# EAGLE board Memory V1.0 (EAGLE 9.6.2)
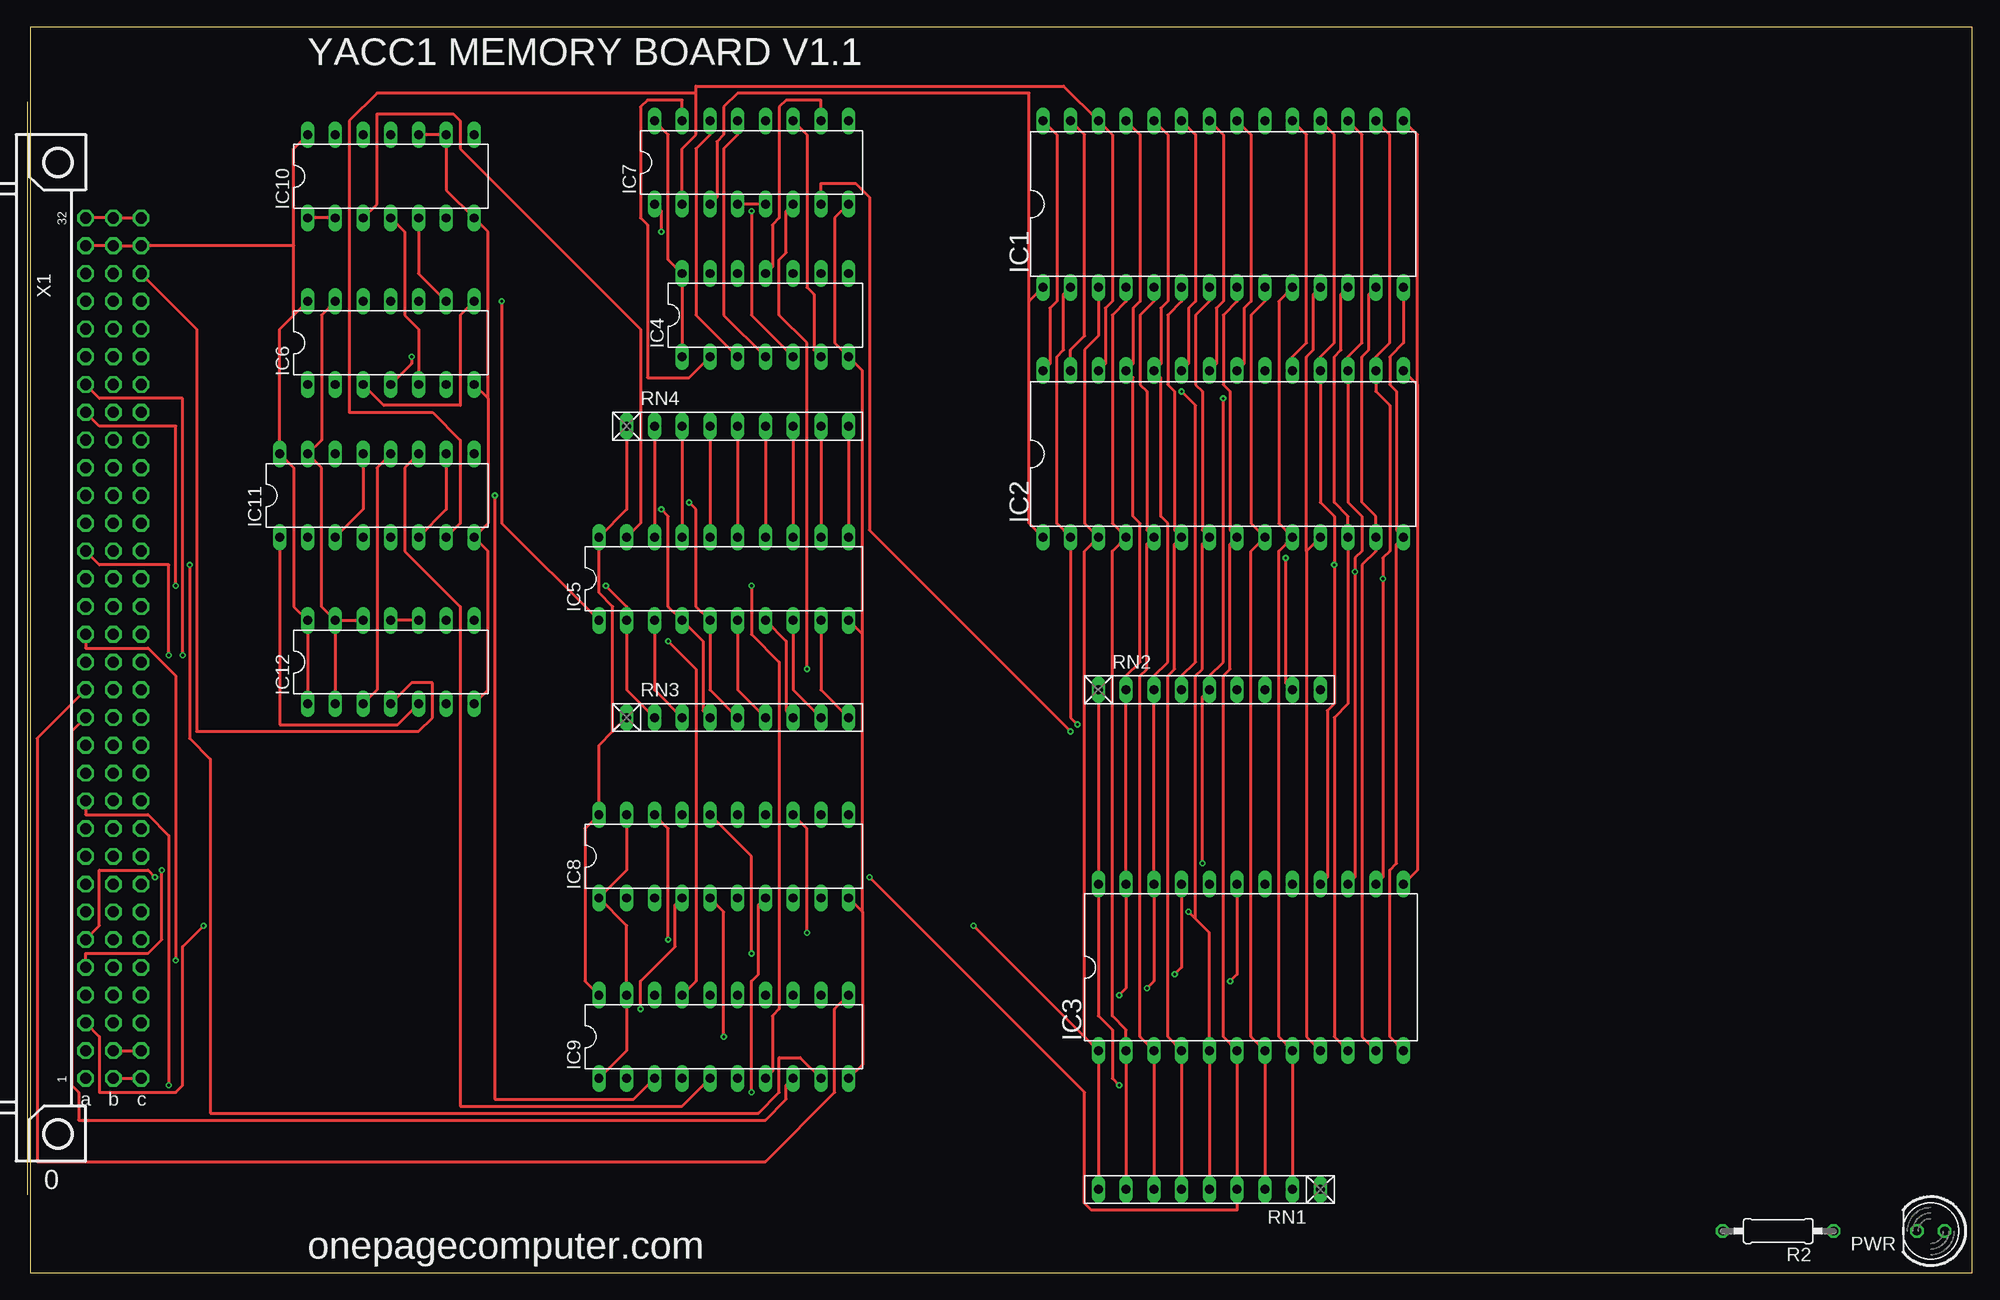
[diagram p0: board, top side]
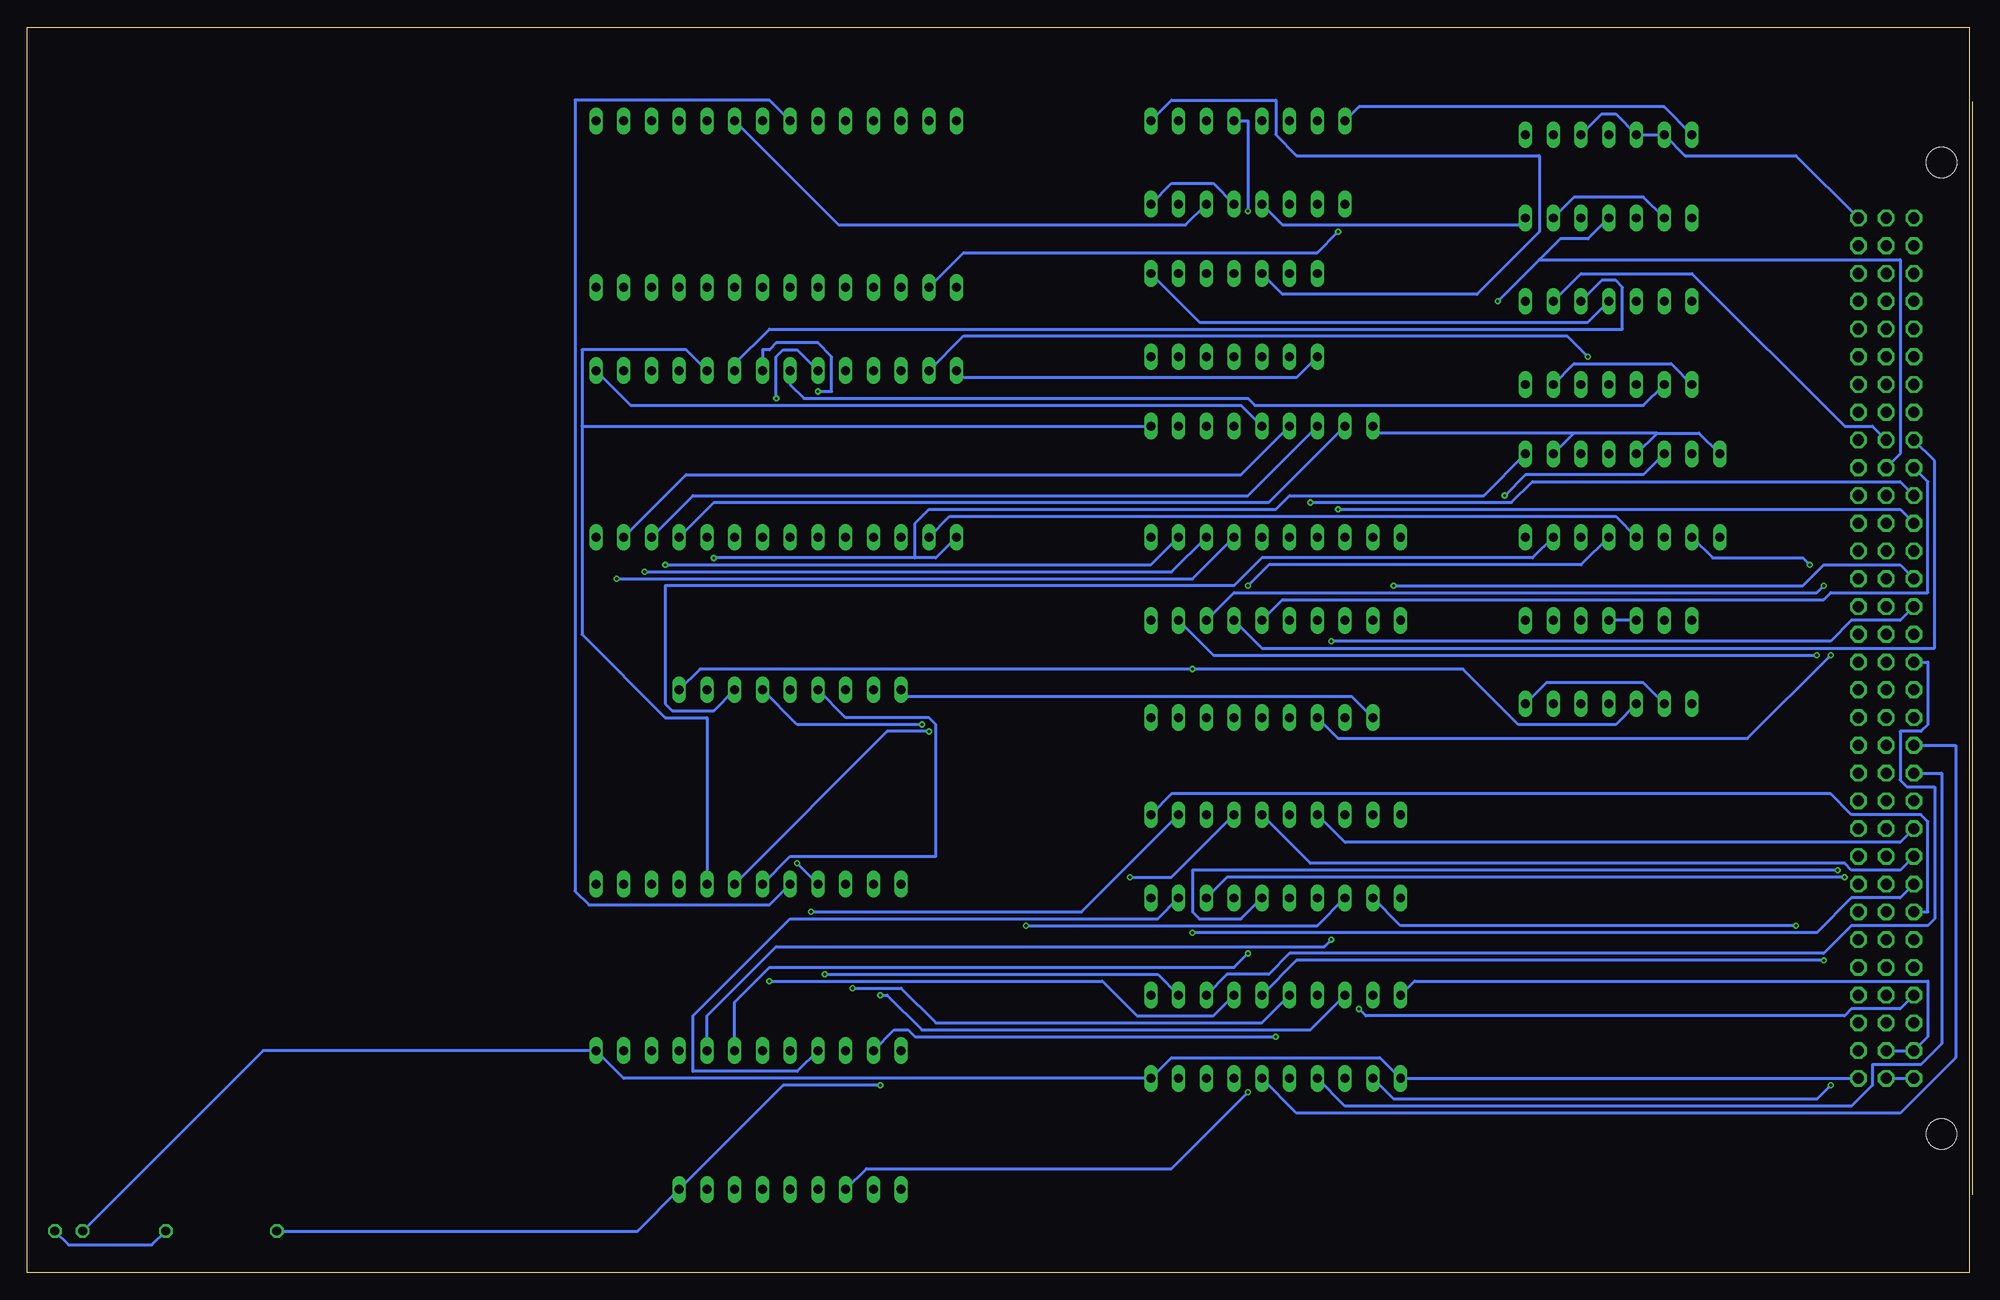
[diagram p1: board, bottom side, seen from below]

Size 177.78 x 113.97 mm. Coordinates in mm from the lower left corner, seen from the top.
Outline: 0,0 177.78,0 177.78,113.97 0,113.97 0,0
Copper layers (1*16): Top 0.035559375mm / dielectric 1.6mm / Bottom 0.035559375mm
Design rules "oshpark-2layer-auto-routing": minimum track width 10mil, minimum drill 10mil, track to track 10mil, track to pad 8mil, pad to pad 8mil, via to via 8mil, smd to smd 6mil, copper to edge 15mil, drill to drill 6mil, minimum pad ring 6mil, minimum via ring 6mil, stop-mask expansion 2.5mil, vias tented up to drill 0mil, thermal gap 10mil
Net classes: 1 GND: width 1 mm; 2 5V: width 1 mm

## Footprints (pad centres in the part's own frame; a part is rotated, then mirrored left to right if it is on the bottom)
DIL28-6 = drill 0.813 long: 1 -16.51,-7.62; 2 -13.97,-7.62; 3 -11.43,-7.62; 4 -8.89,-7.62; 5 -6.35,-7.62; 6 -3.81,-7.62; 7 -1.27,-7.62; 8 1.27,-7.62; 9 3.81,-7.62; 10 6.35,-7.62; 11 8.89,-7.62; 12 11.43,-7.62; 13 13.97,-7.62; 14 16.51,-7.62; 15 16.51,7.62; 16 13.97,7.62; 17 11.43,7.62; 18 8.89,7.62; 19 6.35,7.62; 20 3.81,7.62; 21 1.27,7.62; 22 -1.27,7.62; 23 -3.81,7.62; 24 -6.35,7.62; 25 -8.89,7.62; 26 -11.43,7.62; 27 -13.97,7.62; 28 -16.51,7.62
DIL24 = drill 0.813 long: 1 -13.97,-7.62; 2 -11.43,-7.62; 3 -8.89,-7.62; 4 -6.35,-7.62; 5 -3.81,-7.62; 6 -1.27,-7.62; 7 1.27,-7.62; 8 3.81,-7.62; 9 6.35,-7.62; 10 8.89,-7.62; 11 11.43,-7.62; 12 13.97,-7.62; 13 13.97,7.62; 14 11.43,7.62; 15 8.89,7.62; 16 6.35,7.62; 17 3.81,7.62; 18 1.27,7.62; 19 -1.27,7.62; 20 -3.81,7.62; 21 -6.35,7.62; 22 -8.89,7.62; 23 -11.43,7.62; 24 -13.97,7.62
DIL14 = drill 0.813 long: 1 -7.62,-3.81; 2 -5.08,-3.81; 3 -2.54,-3.81; 4 0,-3.81; 5 2.54,-3.81; 6 5.08,-3.81; 7 7.62,-3.81; 8 7.62,3.81; 9 5.08,3.81; 10 2.54,3.81; 11 0,3.81; 12 -2.54,3.81; 13 -5.08,3.81; 14 -7.62,3.81
DIL20 = drill 0.813 long: 1 -11.43,-3.81; 2 -8.89,-3.81; 3 -6.35,-3.81; 4 -3.81,-3.81; 5 -1.27,-3.81; 6 1.27,-3.81; 7 3.81,-3.81; 8 6.35,-3.81; 9 8.89,-3.81; 10 11.43,-3.81; 11 11.43,3.81; 12 8.89,3.81; 13 6.35,3.81; 14 3.81,3.81; 15 1.27,3.81; 16 -1.27,3.81; 17 -3.81,3.81; 18 -6.35,3.81; 19 -8.89,3.81; 20 -11.43,3.81
DIL16 = drill 0.813 long: 1 -8.89,-3.81; 2 -6.35,-3.81; 3 -3.81,-3.81; 4 -1.27,-3.81; 5 1.27,-3.81; 6 3.81,-3.81; 7 6.35,-3.81; 8 8.89,-3.81; 9 8.89,3.81; 10 6.35,3.81; 11 3.81,3.81; 12 1.27,3.81; 13 -1.27,3.81; 14 -3.81,3.81; 15 -6.35,3.81; 16 -8.89,3.81
LED5MM = drill 0.813 octagon: A -1.27,0; K 1.27,0
0207/10 = drill 0.813 octagon: 1 -5.08,0; 2 5.08,0
RN-9 = drill 0.813 long: 1 -10.16,0; 2 -7.62,0; 3 -5.08,0; 4 -2.54,0; 5 0,0; 6 2.54,0; 7 5.08,0; 8 7.62,0; 9 10.16,0
FABC96R = drill 1.016 octagon: A1 -2.54,39.37; A2 -2.54,36.83; A3 -2.54,34.29; A4 -2.54,31.75; A5 -2.54,29.21; A6 -2.54,26.67; A7 -2.54,24.13; A8 -2.54,21.59; A9 -2.54,19.05; A10 -2.54,16.51; A11 -2.54,13.97; A12 -2.54,11.43; A13 -2.54,8.89; A14 -2.54,6.35; A15 -2.54,3.81; A16 -2.54,1.27; A17 -2.54,-1.27; A18 -2.54,-3.81; A19 -2.54,-6.35; A20 -2.54,-8.89; A21 -2.54,-11.43; A22 -2.54,-13.97; A23 -2.54,-16.51; A24 -2.54,-19.05; A25 -2.54,-21.59; A26 -2.54,-24.13; A27 -2.54,-26.67; A28 -2.54,-29.21; A29 -2.54,-31.75; A30 -2.54,-34.29; A31 -2.54,-36.83; A32 -2.54,-39.37; B1 -5.08,39.37; B2 -5.08,36.83; B3 -5.08,34.29; B4 -5.08,31.75; B5 -5.08,29.21; B6 -5.08,26.67; B7 -5.08,24.13; B8 -5.08,21.59; B9 -5.08,19.05; B10 -5.08,16.51; B11 -5.08,13.97; B12 -5.08,11.43; B13 -5.08,8.89; B14 -5.08,6.35; B15 -5.08,3.81; B16 -5.08,1.27; B17 -5.08,-1.27; B18 -5.08,-3.81; B19 -5.08,-6.35; B20 -5.08,-8.89; B21 -5.08,-11.43; B22 -5.08,-13.97; B23 -5.08,-16.51; B24 -5.08,-19.05; B25 -5.08,-21.59; B26 -5.08,-24.13; B27 -5.08,-26.67; B28 -5.08,-29.21; B29 -5.08,-31.75; B30 -5.08,-34.29; B31 -5.08,-36.83; B32 -5.08,-39.37; C1 -7.62,39.37; C2 -7.62,36.83; C3 -7.62,34.29; C4 -7.62,31.75; C5 -7.62,29.21; C6 -7.62,26.67; C7 -7.62,24.13; C8 -7.62,21.59; C9 -7.62,19.05; C10 -7.62,16.51; C11 -7.62,13.97; C12 -7.62,11.43; C13 -7.62,8.89; C14 -7.62,6.35; C15 -7.62,3.81; C16 -7.62,1.27; C17 -7.62,-1.27; C18 -7.62,-3.81; C19 -7.62,-6.35; C20 -7.62,-8.89; C21 -7.62,-11.43; C22 -7.62,-13.97; C23 -7.62,-16.51; C24 -7.62,-19.05; C25 -7.62,-21.59; C26 -7.62,-24.13; C27 -7.62,-26.67; C28 -7.62,-29.21; C29 -7.62,-31.75; C30 -7.62,-34.29; C31 -7.62,-36.83; C32 -7.62,-39.37 | hole 2.794: 0,-44.456; 0,44.456

## Placement (x,y rotation side)
IC1  [DIL28-6]  109.22,97.79 0 top
IC2  [DIL28-6]  109.22,74.93 0 top
IC3  [DIL24]  111.76,27.94 0 top
IC4  74ALS30N  [DIL14]  67.31,87.63 0 top
IC5  74LS245N  [DIL20]  63.5,63.5 0 top
IC6  74LS04N  [DIL14]  33.02,85.09 0 top
IC7  74LS138N  [DIL16]  66.04,101.6 0 top
IC8  74LS244N  [DIL20]  63.5,38.1 0 top
IC9  74LS244N  [DIL20]  63.5,21.59 0 top
IC10  74ALS00N  [DIL14]  33.02,100.33 0 top
IC11  74LS157N  [DIL16]  31.75,71.12 0 top
IC12  74LS74N  [DIL14]  33.02,55.88 0 top
PWR  [LED5MM]  173.99,3.81 180 top
R2  330  [0207/10]  160.02,3.81 180 top
RN1  [RN-9]  107.95,7.62 180 top
RN2  [RN-9]  107.95,53.34 0 top
RN3  [RN-9]  64.77,50.8 0 top
RN4  [RN-9]  64.77,77.47 0 top
X1  FABC96R  [FABC96R]  2.54,57.15 180 top

## Library data of the parts
IC1 IC2 = memory-hitachi; OC_FARNELL: unknown; OC_NEWARK: unknown
IC3 = memory
IC4 IC6-IC12 = 74xx-us
IC5 = adafruit
PWR = led
R2 = eagle-ltspice; SPICEMODEL: NONE; SPICEPREFIX: R
RN1-RN4 = resistor-net; OC_FARNELL: unknown; OC_NEWARK: unknown
X1 = con-vg

## Nets
-AC-LD: X1.C22
-AC-LD-INV: X1.C20
-AC-RD: X1.C21
-ADDR-REG-LD0: X1.C4
-ADDR-REG-LD1: X1.C6
-ADDR-REG-RD0: X1.C3
-ADDR-REG-RD1: X1.C5
-ALU-FUNC: X1.C15
-BUS-EN: X1.C28
-HI-RAM: IC2.20 IC6.10
-HL-SWAP: X1.C25
-IN: X1.C26
-INT: X1.C13
-INTA: X1.C14
-IO-ADDR-LD: X1.C11
-IO-RD: X1.B25
-IO-WR: X1.B26
-MEM-RD: IC5.1 IC6.5 IC10.4 X1.B23
-MEM-WR: IC6.9 IC10.5 X1.B24
-OUT: X1.C27
-REG-DN: X1.B21
-REG-FUNC-LD: X1.B8
-REG-FUNC-RD: X1.B7
-REG-LD-HI: X1.B20
-REG-LD-LO: X1.B18
-REG-RD-HI: X1.B19
-REG-RD-LO: X1.B17
-REG-UP: X1.B22
-RESET: IC12.4 X1.C30
-ROM: IC3.18 IC7.7
-RUN: X1.C29
-SR-LD: X1.C23
-TMP-REG-LD0: X1.B28
-TMP-REG-LD1: X1.B30
-TMP-REG-RD0: X1.B27
-TMP-REG-RD1: X1.B29
ADDR0: IC8.2 X1.A3
ADDR1: IC8.4 X1.A4
ADDR2: IC8.6 X1.A5
ADDR3: IC8.8 X1.A6
ADDR4: IC8.11 X1.A7
ADDR5: IC8.13 X1.A8
ADDR6: IC8.15 X1.A9
ADDR7: IC8.17 X1.A10
ADDR8: IC9.2 X1.A11
ADDR9: IC9.4 X1.A12
ADDR10: IC9.6 X1.A13
ADDR11: IC9.8 X1.A14
ADDR12: IC9.11 X1.A15
ADDR13: IC9.13 X1.A16
ADDR14: IC9.15 X1.A17
ADDR15: IC9.17 X1.A18
ALU0: X1.C16
ALU1: X1.C17
ALU2: X1.C18
ALU3: X1.C19
BADDR0: IC1.10 IC2.10 IC3.8 IC8.18 RN1.2
BADDR1: IC1.9 IC2.9 IC3.7 IC8.16 RN1.3
BADDR2: IC1.8 IC2.8 IC3.6 IC8.14 RN1.4
BADDR3: IC1.7 IC2.7 IC3.5 IC8.12 RN1.5
BADDR4: IC1.6 IC2.6 IC3.4 IC8.9 RN1.6
BADDR5: IC1.5 IC2.5 IC3.3 IC8.7 RN1.7
BADDR6: IC1.4 IC2.4 IC3.2 IC8.5 RN1.8
BADDR7: IC1.3 IC2.3 IC3.1 IC8.3 RN1.9
BADDR8: IC1.25 IC2.25 IC3.23 IC9.18 RN2.2
BADDR9: IC1.24 IC2.24 IC3.22 IC9.16 RN2.3
BADDR10: IC1.21 IC2.21 IC3.19 IC9.14 RN2.4
BADDR11: IC1.23 IC2.23 IC3.21 IC9.12 RN2.5
BADDR12: IC1.2 IC2.2 IC7.1 IC11.4 RN2.6
BADDR13: IC1.26 IC2.26 IC7.2 IC11.7 RN2.7
BADDR14: IC1.1 IC2.1 IC7.3 IC11.9 RN2.8
BADDR15: IC1.20 IC7.6 IC11.12 IC12.3 RN2.9
BDATA0: IC1.11 IC2.11 IC3.9 IC5.18 RN4.2
BDATA1: IC1.12 IC2.12 IC3.10 IC5.17 RN4.3
BDATA2: IC1.13 IC2.13 IC3.11 IC5.16 RN4.4
BDATA3: IC1.15 IC2.15 IC3.13 IC5.15 RN4.5
BDATA4: IC1.16 IC2.16 IC3.14 IC5.14 RN4.6
BDATA5: IC1.17 IC2.17 IC3.15 IC5.13 RN4.7
BDATA6: IC1.18 IC2.18 IC3.16 IC5.12 RN4.8
BDATA7: IC1.19 IC2.19 IC3.17 IC5.11 RN4.9
BR-COND: X1.C24
DATA0: IC5.2 RN3.2 X1.A19
DATA1: IC5.3 RN3.3 X1.A20
DATA2: IC5.4 RN3.4 X1.A21
DATA3: IC5.5 RN3.5 X1.A22
DATA4: IC5.6 RN3.6 X1.A23
DATA5: IC5.7 RN3.7 X1.A24
DATA6: IC5.8 RN3.8 X1.A25
DATA7: IC5.9 RN3.9 X1.A26
DATA8: X1.A27
DATA9: X1.A28
DATA10: X1.A29
DATA11: X1.A30
DATA12: X1.B3
DATA13: X1.B4
DATA14: X1.B5
DATA15: X1.B6
FORCE-ROM: IC11.1 IC12.5
GND: IC1.14 IC2.14 IC3.12 IC4.7 IC5.10 IC6.7 IC6.13 IC7.4 IC7.5 IC7.8 IC8.1 IC8.10 IC8.19 IC9.1 IC9.10 IC9.19 IC10.7 IC10.9 IC10.10 IC10.12 IC10.13 IC11.8 IC11.15 IC12.2 IC12.7 IC12.10 IC12.11 IC12.12 IC12.13 PWR.K X1.A1 X1.A32 X1.B1 X1.B32 X1.C1 X1.C32
IO-ADDR0: X1.C7
IO-ADDR1: X1.C8
IO-ADDR2: X1.C9
IO-ADDR3: X1.C10
MEM-RD: IC6.1 IC6.6
N$1: IC4.12 IC7.9
N$2: IC6.3 IC6.8
N$3: IC1.22 IC2.22 IC3.20 IC6.2
N$4: IC1.27 IC2.27 IC6.4
N$5: IC4.11 IC7.10
N$6: IC4.6 IC7.11
N$7: IC4.5 IC7.12
N$8: IC4.4 IC7.13
N$9: IC4.3 IC7.14
N$10: IC4.2 IC7.15
N$11: PWR.A R2.1
N$12: IC10.1 IC10.2 IC10.6
N$13: IC5.19 IC10.3
N$14: IC4.8 IC6.11
N$15: IC9.9 IC11.2
N$16: IC9.7 IC11.5
N$17: IC9.5 IC11.11
N$18: IC9.3 IC11.14
REG-LD-ID0: X1.B13
REG-LD-ID1: X1.B14
REG-LD-ID2: X1.B15
REG-LD-ID3: X1.B16
REG-RD-ID0: X1.B9
REG-RD-ID1: X1.B10
REG-RD-ID2: X1.B11
REG-RD-ID3: X1.B12
UNUSED0: X1.C12
VCC: IC1.28 IC2.28 IC3.24 IC4.1 IC4.14 IC5.20 IC6.14 IC7.16 IC8.20 IC9.20 IC10.14 IC11.3 IC11.6 IC11.10 IC11.13 IC11.16 IC12.1 IC12.14 R2.2 RN1.1 RN2.1 RN3.1 RN4.1 X1.A2 X1.A31 X1.B2 X1.B31 X1.C2 X1.C31

## Tracks (layer width: path | path; a pad name or v marks a point on that pad's centre or on a via)
-HI-RAM
  Bottom 0.254: IC6.10 33.66,90.81 32.38,90.81 31.75,90.17 31.75,86.36 109.86,86.36 113.03,83.19 IC2.20
-MEM-RD  (via drill 0.25)
  Top 0.254: IC5.1 43.18,68.58 v43.18,88.9 | IC6.5 35.56,86.36 34.29,87.63 34.29,95.25 IC10.4
  Bottom 0.254: 39.37,92.71 37.47,94.61 34.92,94.61 IC10.4 | 39.37,92.71 v43.18,88.9 | X1.B23 6.35,74.93 6.35,92.71 39.37,92.71
-MEM-WR
  Top 0.254: IC6.9 35.56,91.44 IC10.5
  Bottom 0.254: X1.B24 8.89,77.47 11.43,77.47 25.4,91.44 35.56,91.44 IC6.9
-RESET
  Top 0.254: IC12.4 34.92,53.98 36.83,53.98 36.83,50.8 35.56,49.53 15.24,49.53 15.24,86.36 X1.C30
-ROM  (via drill 0.25)
  Top 0.254: v95.25,49.53 76.83,67.94 76.83,98.42 75.56,99.69 72.39,99.69 IC7.7
  Bottom 0.254: IC3.18 99.06,49.53 v95.25,49.53
ADDR0  (via drill 0.25)
  Top 0.254: v15.88,31.75 13.97,29.84 13.97,17.14 13.34,16.51 6.35,16.51 6.35,21.59 X1.A3
  Bottom 0.254: IC8.2 52.07,31.75 v15.88,31.75
ADDR1  (via drill 0.25)
  Top 0.254: IC8.4 59.05,33.66 59.05,29.84 55.88,26.67 v55.88,24.13
  Bottom 0.254: v55.88,24.13 55.24,23.5 11.43,23.5 10.79,24.13 6.35,24.13 X1.A4
ADDR2  (via drill 0.25)
  Top 0.254: v12.06,36.83 12.06,30.48 10.79,29.21 5.08,29.21 X1.A5
  Bottom 0.254: IC8.6 66.67,32.38 70.48,32.38 71.12,33.02 71.12,36.83 v12.06,36.83
ADDR3  (via drill 0.25)
  Top 0.254: v11.43,36.2 10.79,36.83 6.35,36.83 6.35,31.75 X1.A6
  Bottom 0.254: IC8.8 67.94,36.2 v11.43,36.2
ADDR4
  Bottom 0.254: IC8.11 73.03,43.81 12.7,43.81 10.79,41.91 4.45,41.91 3.81,41.27 3.81,33.02 X1.A7
ADDR5  (via drill 0.25)
  Top 0.254: IC8.13 71.12,40.64 v71.12,31.11
  Bottom 0.254: v71.12,31.11 13.97,31.11 10.79,34.29 6.35,34.29 X1.A8
ADDR6
  Bottom 0.254: IC8.15 60.33,37.47 11.43,37.47 10.79,36.83 6.35,36.83 X1.A9
ADDR7
  Bottom 0.254: IC8.17 57.15,39.37 6.35,39.37 X1.A10
ADDR8  (via drill 0.25)
  Top 0.254: v12.7,17.14 12.7,40.01 10.79,41.91 5.08,41.91 X1.A11
  Bottom 0.254: IC9.2 52.7,15.88 13.97,15.88 v12.7,17.14
ADDR9
  Bottom 0.254: IC9.4 57.15,15.24 10.79,15.24 8.89,17.14 8.89,19.05 4.45,19.05 2.54,20.95 2.54,45.72 X1.A12
ADDR10
  Bottom 0.254: IC9.6 61.59,14.61 6.35,14.61 1.27,19.68 1.27,48.26 X1.A13
ADDR11
  Top 0.254: IC9.8 69.22,17.14 69.22,15.88 67.31,13.97 4.45,13.97 4.45,16.51 3.81,17.14 3.81,49.53 X1.A14
ADDR12
  Top 0.254: IC9.11 73.66,24.13 73.66,16.51 67.31,10.16 0.64,10.16 0.64,48.9 X1.A15
ADDR13
  Bottom 0.254: IC9.13 67.94,27.3 64.14,27.3 62.23,29.21 13.34,29.21 10.79,31.75 3.81,31.75 3.17,32.38 3.17,44.45 5.71,44.45 6.35,45.09 6.35,49.53 4.45,49.53 3.81,50.16 3.81,55.88 X1.A16
ADDR14  (via drill 0.25)
  Top 0.254: v13.34,28.57 13.34,54.61 10.79,57.15 5.08,57.15 X1.A17
  Bottom 0.254: IC9.15 61.59,28.57 v13.34,28.57
ADDR15  (via drill 0.25)
  Top 0.254: IC9.17 60.96,26.67 60.96,55.24 v58.42,57.78
  Bottom 0.254: v58.42,57.78 12.7,57.78 10.79,59.69 6.35,59.69 X1.A18
BADDR0  (via drill 0.25)
  Top 0.254: IC1.10 114.3,88.9 114.3,68.58 IC2.10 114.3,66.04 114.3,21.59 IC3.8 RN1.2 | IC8.18 58.42,40.64 v58.42,30.48
  Bottom 0.254: v58.42,30.48 59.05,29.84 109.22,29.84 115.57,23.5 IC3.8
BADDR1  (via drill 0.25)
  Top 0.254: IC1.9 113.03,88.9 111.76,87.63 111.76,68.58 IC2.9 111.76,66.04 111.76,21.59 IC3.7 RN1.3 | IC8.16 66.04,38.1 v66.04,29.21
  Bottom 0.254: v66.04,29.21 67.31,27.94 109.86,27.94 113.03,24.77 IC3.7
BADDR2  (via drill 0.25)
  Top 0.254: IC1.8 110.49,88.9 109.22,87.63 109.22,81.28 109.86,80.64 109.86,67.94 IC2.8 109.86,66.67 109.86,55.24 109.22,54.61 109.22,21.59 IC3.6 RN1.4 110.49,5.71 97.16,5.71 96.52,6.35 96.52,16.51 v76.83,36.2
  Bottom 0.254: IC8.14 73.03,36.2 v76.83,36.2
BADDR3  (via drill 0.25)
  Top 0.254: IC1.7 107.95,88.9 106.68,87.63 106.68,81.28 107.31,80.64 107.31,67.94 IC2.7 107.31,66.67 107.31,55.24 106.68,54.61 106.68,32.38 | RN1.5 IC3.5 107.95,31.11 106.68,32.38 | 106.68,32.38 v106.05,33.02
  Bottom 0.254: IC8.12 81.28,33.02 v106.05,33.02
BADDR4
  Top 0.254: IC1.6 105.41,88.9 104.14,87.63 104.14,81.28 104.78,80.64 104.78,67.94 IC2.6 104.78,66.67 104.78,55.24 104.14,54.61 104.14,21.59 IC3.4 RN1.6
  Bottom 0.254: IC8.9 74.3,32.38 107.95,32.38 116.84,23.5 116.84,18.41 107.31,18.41 IC3.4
BADDR5  (via drill 0.25)
  Top 0.254: IC1.5 102.87,88.9 101.6,87.63 101.6,81.28 102.23,80.64 102.23,67.94 IC2.5 102.23,66.67 102.23,55.24 101.6,54.61 101.6,21.59 IC3.3 RN1.7 | IC8.7 66.67,33.66 66.67,27.3 66.04,26.67 v66.04,16.51
  Bottom 0.254: v66.04,16.51 73.03,9.53 100.97,9.53 RN1.7
BADDR6  (via drill 0.25)
  Top 0.254: IC1.4 100.33,88.9 99.06,87.63 99.06,68.58 IC2.4 99.06,66.04 99.06,23.5 100.33,22.23 IC3.2 RN1.8 | IC8.5 63.5,33.02 v63.5,21.59
  Bottom 0.254: v63.5,21.59 96.52,21.59 97.16,22.23 98.42,22.23 IC3.2
BADDR7  (via drill 0.25)
  Top 0.254: IC1.3 97.79,85.72 96.52,84.45 96.52,68.58 IC2.3 96.52,66.04 96.52,21.59 | RN1.9 IC3.1 96.52,21.59 | 96.52,21.59 v86.36,31.75
  Bottom 0.254: IC8.3 59.69,31.75 v86.36,31.75
BADDR8  (via drill 0.25)
  Top 0.254: IC1.25 101.6,104.14 101.6,88.9 100.97,88.27 100.97,83.19 IC2.25 100.97,81.92 100.97,69.22 101.6,68.58 101.6,55.88 100.33,54.61 RN2.2 IC3.23 100.33,26.04 v99.69,25.4
  Bottom 0.254: IC9.18 60.33,22.23 95.89,22.23 99.06,25.4 v99.69,25.4
BADDR9  (via drill 0.25)
  Top 0.254: IC1.24 104.14,104.14 104.14,88.9 103.5,88.27 103.5,83.19 IC2.24 103.5,81.92 103.5,69.22 104.14,68.58 104.14,55.88 102.87,54.61 RN2.3 IC3.22 102.87,26.67 v102.23,26.04
  Bottom 0.254: IC9.16 64.77,22.86 94.61,22.86 97.79,26.04 v102.23,26.04
BADDR10  (via drill 0.25)
  Top 0.254: IC2.21 111.12,83.19 111.12,88.27 111.76,88.9 111.76,104.14 IC1.21 | v109.86,26.67 110.49,27.3 IC3.19 | v105.41,80.64 106.68,79.38 106.68,55.88 105.41,54.61 RN2.4
  Bottom 0.254: IC9.14 69.22,23.5 76.2,23.5 79.38,26.67 v109.86,26.67 | RN2.4 102.87,50.8 95.25,50.8 94.61,50.16 94.61,38.1 107.95,38.1 IC3.19 | IC2.21 110.49,84.45 109.86,84.45 109.22,85.09 105.41,85.09 104.14,83.82 104.14,80.64 v105.41,80.64
BADDR11  (via drill 0.25)
  Top 0.254: IC2.23 106.05,83.19 106.05,88.27 106.68,88.9 106.68,104.14 IC1.23 | v104.78,27.3 105.41,27.94 IC3.21 | v107.31,37.47 107.31,52.7 RN2.5 107.95,54.61 109.22,55.88 v109.22,80.01
  Bottom 0.254: IC9.12 74.3,27.3 v104.78,27.3 | IC3.21 v107.31,37.47 | IC2.23 107.31,84.45 108.58,84.45 109.22,83.82 v109.22,80.01
BADDR12  (via drill 0.25)
  Top 0.254: v95.89,50.16 95.25,50.8 IC2.2 93.98,68.58 93.98,83.82 94.61,84.45 94.61,89.53 IC1.2 | IC7.1 57.78,97.16 v57.78,95.25
  Bottom 0.254: IC11.4 32.38,69.22 93.34,69.22 IC2.2 | RN2.6 107.31,50.16 v95.89,50.16 | v57.78,95.25 59.69,93.34 92.08,93.34 IC1.2
BADDR13
  Top 0.254: IC2.26 98.42,83.19 98.42,88.27 99.06,88.9 99.06,104.14 IC1.26 94.61,108.58 60.96,108.58 60.96,107.95 | IC11.7 39.37,68.58 39.37,76.2 36.83,78.74 29.21,78.74 29.21,105.41 31.75,107.95 60.96,107.95 | 60.96,107.95 60.96,104.14 59.69,102.87 IC7.2
  Bottom 0.254: RN2.7 114.94,51.44 118.75,51.44 119.38,52.07 119.38,62.87 67.31,62.87 64.77,65.41 40.01,65.41 IC11.7
BADDR14  (via drill 0.25)
  Top 0.254: 91.44,88.9 IC1.1 | 91.44,88.9 91.44,68.58 IC2.1 | RN2.8 114.94,53.98 v114.94,65.41 | IC7.3 62.87,98.42 62.87,103.5 63.5,104.14 63.5,106.68 64.77,107.95 91.44,107.95 91.44,88.9
  Bottom 0.254: IC11.9 44.45,71.12 62.23,71.12 63.5,69.85 95.25,69.85 96.52,68.58 96.52,65.41 | 96.52,65.41 94.61,65.41 IC2.1 | 96.52,65.41 v114.94,65.41
BADDR15  (via drill 0.25)
  Top 0.254: IC12.3 31.75,53.34 31.75,73.66 IC11.12 | IC7.6 69.22,97.16 69.22,93.34 68.58,92.71 68.58,87.63 71.12,85.09 v71.12,55.24
  Bottom 0.254: IC7.6 71.75,95.89 103.5,95.89 IC1.20 | RN2.9 116.2,55.24 v71.12,55.24 46.35,55.24 41.27,50.16 32.38,50.16 IC12.3
BDATA0
  Top 0.254: RN4.2 IC5.18 | IC3.9 116.84,21.59 116.84,66.04 | IC2.11 116.84,66.04 | IC1.11 117.47,89.53 117.47,84.45 116.84,83.82 116.84,66.04
  Bottom 0.254: RN4.2 64.14,70.48 114.94,70.48 IC2.11
BDATA1
  Top 0.254: RN4.3 IC5.17 | IC3.10 119.38,21.59 119.38,50.8 120.65,52.07 IC2.12 120.65,69.22 119.38,70.48 119.38,83.82 120.02,84.45 120.02,89.53 IC1.12
  Bottom 0.254: RN4.3 66.04,71.12 116.84,71.12 IC2.12
BDATA2
  Top 0.254: RN4.4 IC5.16 | IC3.11 121.92,21.59 121.92,64.77 123.19,66.04 IC2.13 123.19,69.22 121.92,70.48 121.92,83.82 122.56,84.45 122.56,89.53 IC1.13
  Bottom 0.254: RN4.4 66.67,73.03 117.47,73.03 IC2.13
BDATA3
  Top 0.254: RN4.5 IC5.15 | IC3.13 127,36.83 127,81.28 | IC2.15 127,81.28 | IC1.15 127,104.14 127,81.28
  Bottom 0.254: RN4.5 66.67,79.38 122.56,79.38 IC2.15
BDATA4  (via drill 0.25)
  Top 0.254: RN4.6 IC5.14 | IC3.14 123.83,36.2 v123.83,63.5 123.83,65.41 124.46,66.04 124.46,79.38 123.19,80.64 IC2.16 123.19,83.82 124.46,85.09 124.46,104.14 IC1.16
  Bottom 0.254: IC5.14 71.12,63.5 v123.83,63.5
BDATA5  (via drill 0.25)
  Top 0.254: RN4.7 IC5.13 | IC3.15 121.28,36.2 v121.28,64.14 121.28,65.41 121.92,66.04 121.92,69.22 120.65,70.48 IC2.17 120.65,83.82 121.92,85.09 121.92,104.14 IC1.17
  Bottom 0.254: IC5.13 73.03,64.14 v121.28,64.14
BDATA6  (via drill 0.25)
  Top 0.254: RN4.8 IC5.12 | IC3.16 118.75,36.2 118.75,51.44 119.38,52.07 v119.38,64.77 119.38,69.22 118.11,70.48 IC2.18 118.11,83.82 119.38,85.09 119.38,104.14 IC1.18
  Bottom 0.254: IC5.12 74.93,64.77 v119.38,64.77
BDATA7
  Top 0.254: RN4.9 IC5.11 | IC1.19 116.84,104.14 116.84,85.09 115.57,83.82 IC2.19
  Bottom 0.254: IC3.17 115.57,50.8 119.38,50.8 127,58.42 127,77.47 | 127,77.47 127,84.45 117.47,84.45 IC2.19 | 127,77.47 RN4.9
DATA0  (via drill 0.25)
  Top 0.254: RN3.2 54.61,53.34 IC5.2 54.61,60.96 v52.7,62.87
  Bottom 0.254: X1.A19 6.35,64.77 13.34,64.77 15.24,62.87 v52.7,62.87
DATA1  (via drill 0.25)
  Top 0.254: RN3.3 57.15,53.34 IC5.3 | X1.A20 6.35,64.77 12.7,64.77 v12.7,56.52
  Bottom 0.254: v12.7,56.52 20.32,48.9 57.78,48.9 RN3.3
DATA2  (via drill 0.25)
  Top 0.254: RN3.4 61.59,51.44 61.59,57.78 IC5.4 58.42,60.96 58.42,69.22 v57.78,69.85
  Bottom 0.254: X1.A21 6.35,69.85 v57.78,69.85
DATA3  (via drill 0.25)
  Top 0.254: RN3.5 62.23,53.34 IC5.5 60.96,60.96 60.96,69.85 v60.33,70.48
  Bottom 0.254: X1.A22 6.35,72.39 40.01,72.39 41.91,70.48 v60.33,70.48
DATA4
  Top 0.254: RN3.6 64.77,53.34 IC5.6
  Bottom 0.254: X1.A23 3.81,72.39 3.81,62.23 12.7,62.23 13.34,61.59 62.87,61.59 IC5.6
DATA5
  Top 0.254: RN3.7 69.22,51.44 69.22,57.78 IC5.7
  Bottom 0.254: X1.A24 3.17,74.3 3.17,57.15 64.77,57.15 IC5.7
DATA6  (via drill 0.25)
  Top 0.254: RN3.8 69.85,53.34 IC5.8 | X1.A25 6.35,77.47 13.34,77.47 v13.34,62.87
  Bottom 0.254: v13.34,62.87 13.97,62.23 67.31,62.23 IC5.8
DATA7  (via drill 0.25)
  Top 0.254: RN3.9 72.39,53.34 IC5.9 | X1.A26 6.35,80.01 13.97,80.01 v13.97,56.52
  Bottom 0.254: v13.97,56.52 69.22,56.52 IC5.9
FORCE-ROM
  Top 0.254: IC12.5 33.66,50.16 22.86,50.16 IC11.1
GND
  Top 0.254: X1.A32 X1.B32 X1.C32 | IC10.10 IC10.9 38.1,99.06 IC10.7 41.91,95.25 41.91,80.01 | IC6.13 26.67,87.63 26.67,76.2 IC11.15 26.67,73.66 26.67,60.96 IC12.13 | 41.91,80.01 41.91,68.58 IC11.8 41.91,66.04 41.91,53.34 IC12.7 | IC6.7 41.91,80.01 | IC12.10 IC12.11 | IC12.13 IC12.2 | IC12.13 IC12.12 | IC8.19 54.61,36.83 IC8.1 54.61,31.75 IC9.19 54.61,20.32 IC9.1 | X1.B1 X1.C1 | IC7.5 IC7.4 | IC7.8 73.66,96.52 73.66,85.09 IC4.7 76.2,82.55 76.2,58.42 | IC1.14 125.73,85.09 124.46,83.82 124.46,81.28 125.09,80.64 125.09,67.94 IC2.14 125.09,66.67 125.09,37.47 124.46,36.83 124.46,21.59 IC3.12 | IC9.10 76.2,19.05 76.2,33.02 | IC8.10 76.2,33.02 | 76.2,58.42 IC5.10 | 76.2,33.02 76.2,58.42
  Bottom 0.254: IC10.10 33.66,106.05 32.38,106.05 IC10.12 IC10.13 26.04,102.23 15.88,102.23 X1.C32 | IC12.7 38.73,53.98 29.84,53.98 IC12.2 | IC12.12 IC12.11 | X1.B1 X1.A1 | X1.C1 IC9.1 53.98,19.68 73.03,19.68 IC9.10 123.19,17.78 IC3.12 156.21,20.32 PWR.K | IC7.5 69.22,99.69 73.03,99.69 IC7.8 | IC10.7 41.27,95.89 62.87,95.89 IC7.4
MEM-RD
  Bottom 0.254: IC6.1 27.3,83.19 36.2,83.19 IC6.6
N$1
  Bottom 0.254: IC4.12 62.87,89.53 45.09,89.53 39.37,95.25 39.37,102.23 61.59,102.23 63.5,104.14 63.5,107.31 73.03,107.31 IC7.9
N$2
  Top 0.254: IC6.3 32.38,79.38 39.37,79.38 39.37,87.63 IC6.8
N$3
  Top 0.254: IC2.22 108.58,83.19 108.58,88.27 109.22,88.9 109.22,104.14 IC1.22
  Bottom 0.254: IC6.2 29.84,79.38 65.41,79.38 66.04,80.01 106.68,80.01 107.95,81.28 IC2.22 | IC3.20 109.86,33.66 126.36,33.66 127.64,34.92 127.64,107.31 109.86,107.31 IC1.22
N$4  (via drill 0.25)
  Top 0.254: IC6.4 34.92,83.19 v34.92,83.82 | IC1.27 96.52,104.14 96.52,85.72 95.25,84.45 IC2.27
  Bottom 0.254: v34.92,83.82 36.83,85.72 92.08,85.72 IC2.27
N$5
  Top 0.254: IC4.11 67.94,92.08 67.94,95.89 68.58,96.52 68.58,106.68 69.22,107.31 72.39,107.31 IC7.10
N$6
  Top 0.254: IC4.6 71.75,84.45 71.75,89.53 71.12,90.17 71.12,104.14 IC7.11
N$7  (via drill 0.25)
  Top 0.254: IC4.5 66.04,87.63 v66.04,97.16
  Bottom 0.254: v66.04,97.16 66.04,105.41 IC7.12
N$8
  Top 0.254: IC4.4 63.5,87.63 63.5,102.87 64.77,104.14 IC7.13
N$9
  Top 0.254: IC4.3 60.96,87.63 60.96,102.87 62.23,104.14 IC7.14
N$10
  Top 0.254: IC4.2 60.33,81.92 56.52,81.92 56.52,95.89 55.88,96.52 55.88,106.68 56.52,107.31 59.69,107.31 IC7.15
N$11
  Bottom 0.254: R2.1 166.37,2.54 173.99,2.54 PWR.A
N$12
  Top 0.254: IC10.2 IC10.1
  Bottom 0.254: IC10.6 36.2,98.42 29.84,98.42 IC10.2
N$13
  Top 0.254: IC5.19 55.88,68.58 55.88,86.36 39.37,102.87 39.37,105.41 38.73,106.05 31.75,106.05 31.75,97.79 IC10.3
N$14
  Bottom 0.254: IC6.11 34.92,87 70.48,87 IC4.8
N$15  (via drill 0.25)
  Top 0.254: IC9.9 70.48,19.68 68.58,19.68 68.58,16.51 66.67,14.61 16.51,14.61 16.51,46.99 14.61,48.9 v14.61,64.77
  Bottom 0.254: v14.61,64.77 15.24,65.41 23.5,65.41 IC11.2
N$16  (via drill 0.25)
  Top 0.254: IC9.7 67.94,18.41 67.94,23.5 68.58,24.13 68.58,55.88 66.04,58.42 v66.04,62.87
  Bottom 0.254: v66.04,62.87 64.14,64.77 35.56,64.77 IC11.5
N$17
  Top 0.254: IC9.5 59.69,15.24 39.37,15.24 39.37,60.96 34.29,66.04 34.29,73.66 IC11.11
N$18  (via drill 0.25)
  Top 0.254: IC9.3 55.24,15.88 42.55,15.88 v42.55,71.12
  Bottom 0.254: v42.55,71.12 40.64,73.03 29.84,73.03 IC11.14
VCC  (via drill 0.25)
  Top 0.254: IC2.28 93.34,83.19 93.34,88.27 93.98,88.9 93.98,104.14 IC1.28 | IC4.1 IC4.14 58.42,92.71 58.42,104.14 IC7.16 | RN4.1 54.61,69.85 IC5.20 52.07,62.23 53.34,60.96 53.34,49.53 | IC11.6 38.1,69.85 IC11.10 | IC12.1 IC12.14 24.13,60.96 24.13,73.66 IC11.16 22.86,86.36 24.13,87.63 | X1.A31 X1.B31 X1.C31 24.13,93.98 | 24.13,87.63 IC6.14 | IC10.14 24.13,102.87 24.13,93.98 | 24.13,87.63 24.13,93.98 | IC11.3 30.48,69.85 IC11.13 | RN2.1 IC3.24 97.79,23.5 99.06,22.23 99.06,17.78 v99.69,17.14 | X1.B2 X1.C2 | IC9.20 50.8,26.67 50.8,40.64 IC8.20 52.07,48.26 53.34,49.53 | 53.34,49.53 RN3.1
  Bottom 0.254: IC2.28 92.08,81.92 61.59,81.92 IC4.1 | IC11.16 24.77,76.83 28.57,76.83 | IC11.13 28.57,76.83 | 36.2,76.83 IC11.10 | 28.57,76.83 36.2,76.83 | RN4.1 53.98,76.83 36.2,76.83 | IC7.16 55.88,106.68 27.94,106.68 IC10.14 | R2.2 121.92,3.81 RN1.1 108.58,17.14 v99.69,17.14 | X1.B2 X1.A2 3.81,21.59 3.81,26.67 50.8,26.67 IC9.20 | RN2.1 97.16,52.7 56.52,52.7 RN3.1

## Text on the board
tNames: YACC1 MEMORY BOARD V1.1 | 0 | onepagecomputer.com